# Altium PCB 20A_3V3_EVB.PcbDoc
Units mil, origin at the board's own origin, x right, y up, seen from the top; angles counter-clockwise.
Board outline 1909.45 x 1606.3 mil, 4 copper layers (Top Layer, Layer 1, Layer 2, Bottom Layer), stack 62.45 mil thick; 36 components, 20 nets, 115 pads, 836 vias.
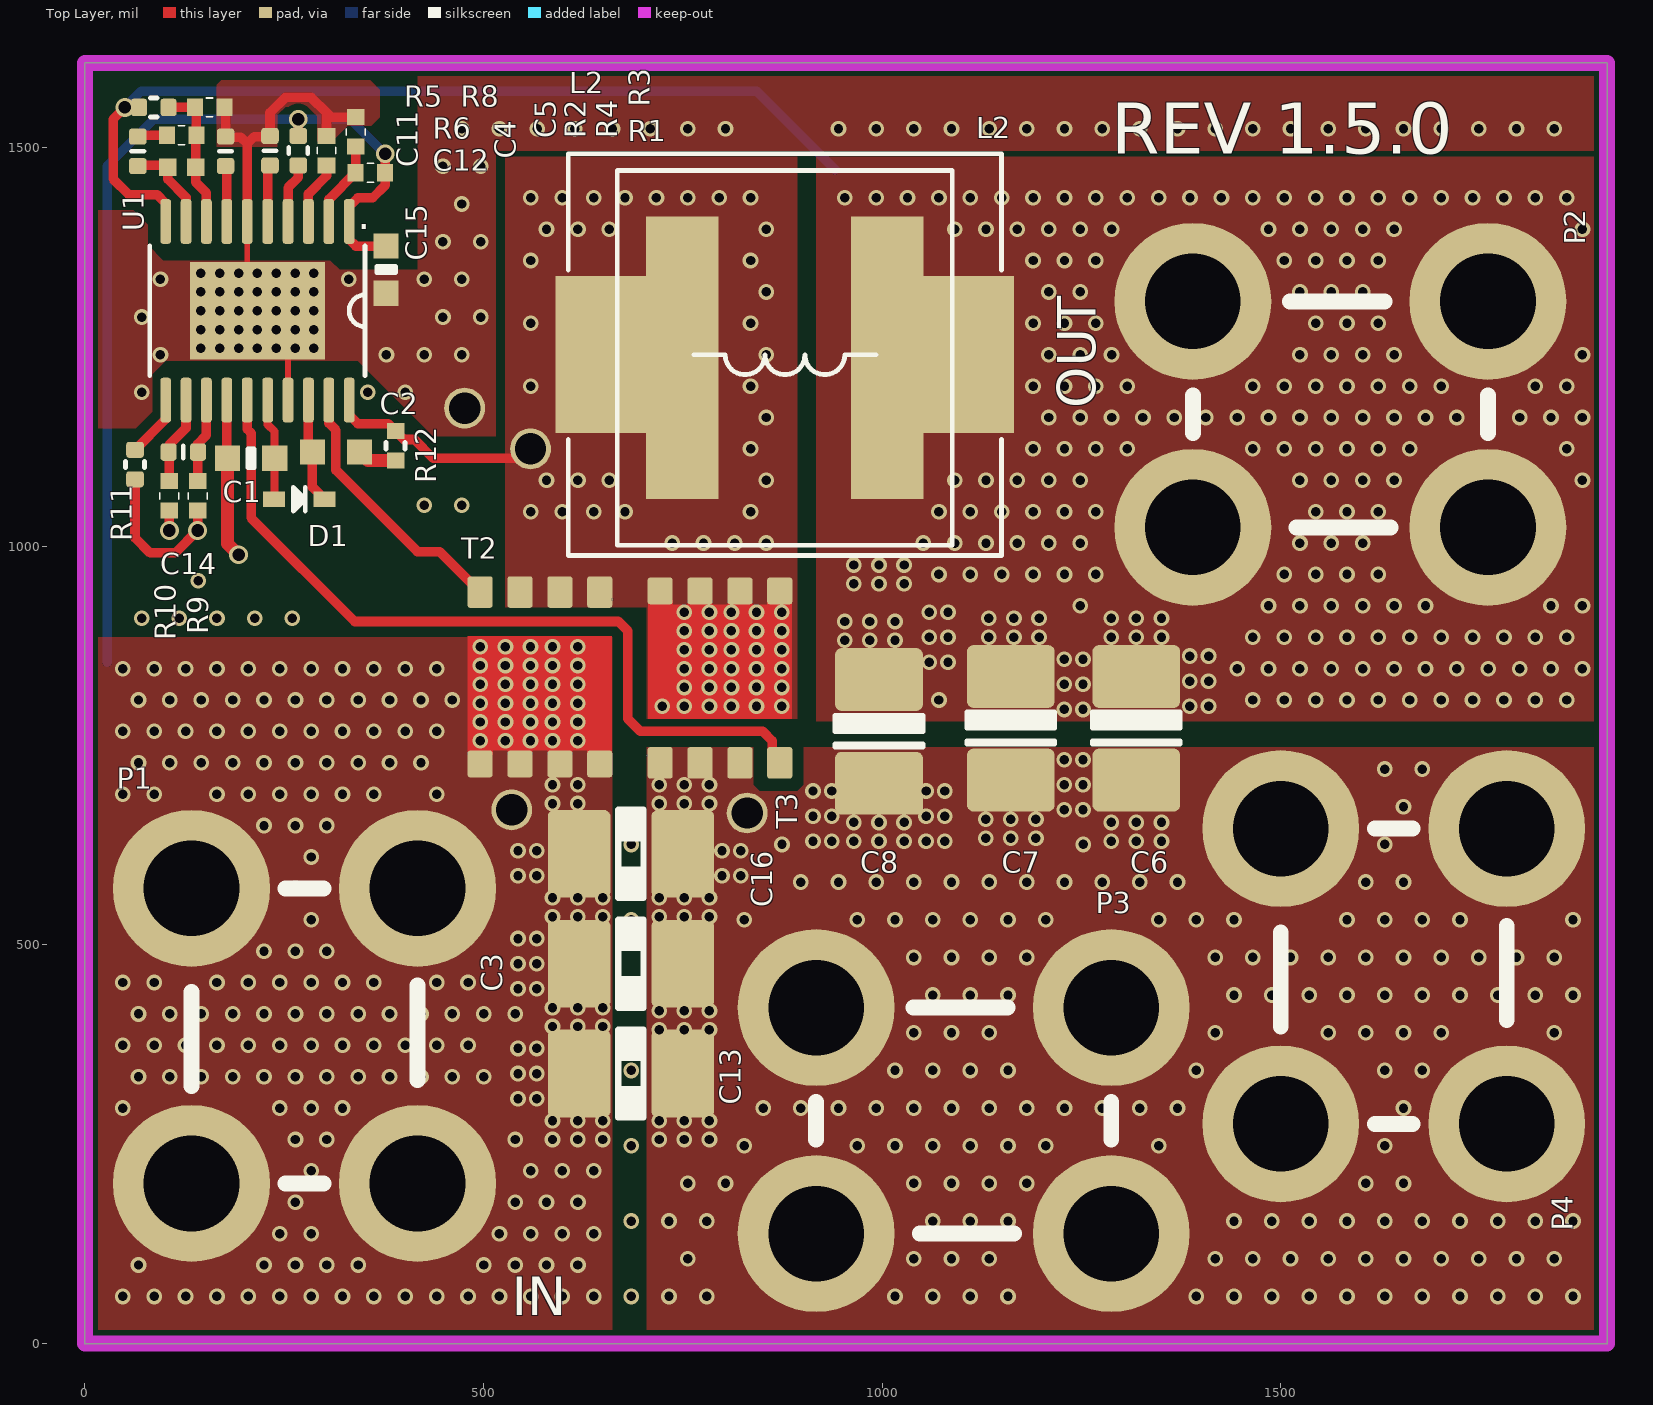
[diagram p0: Top Layer view]
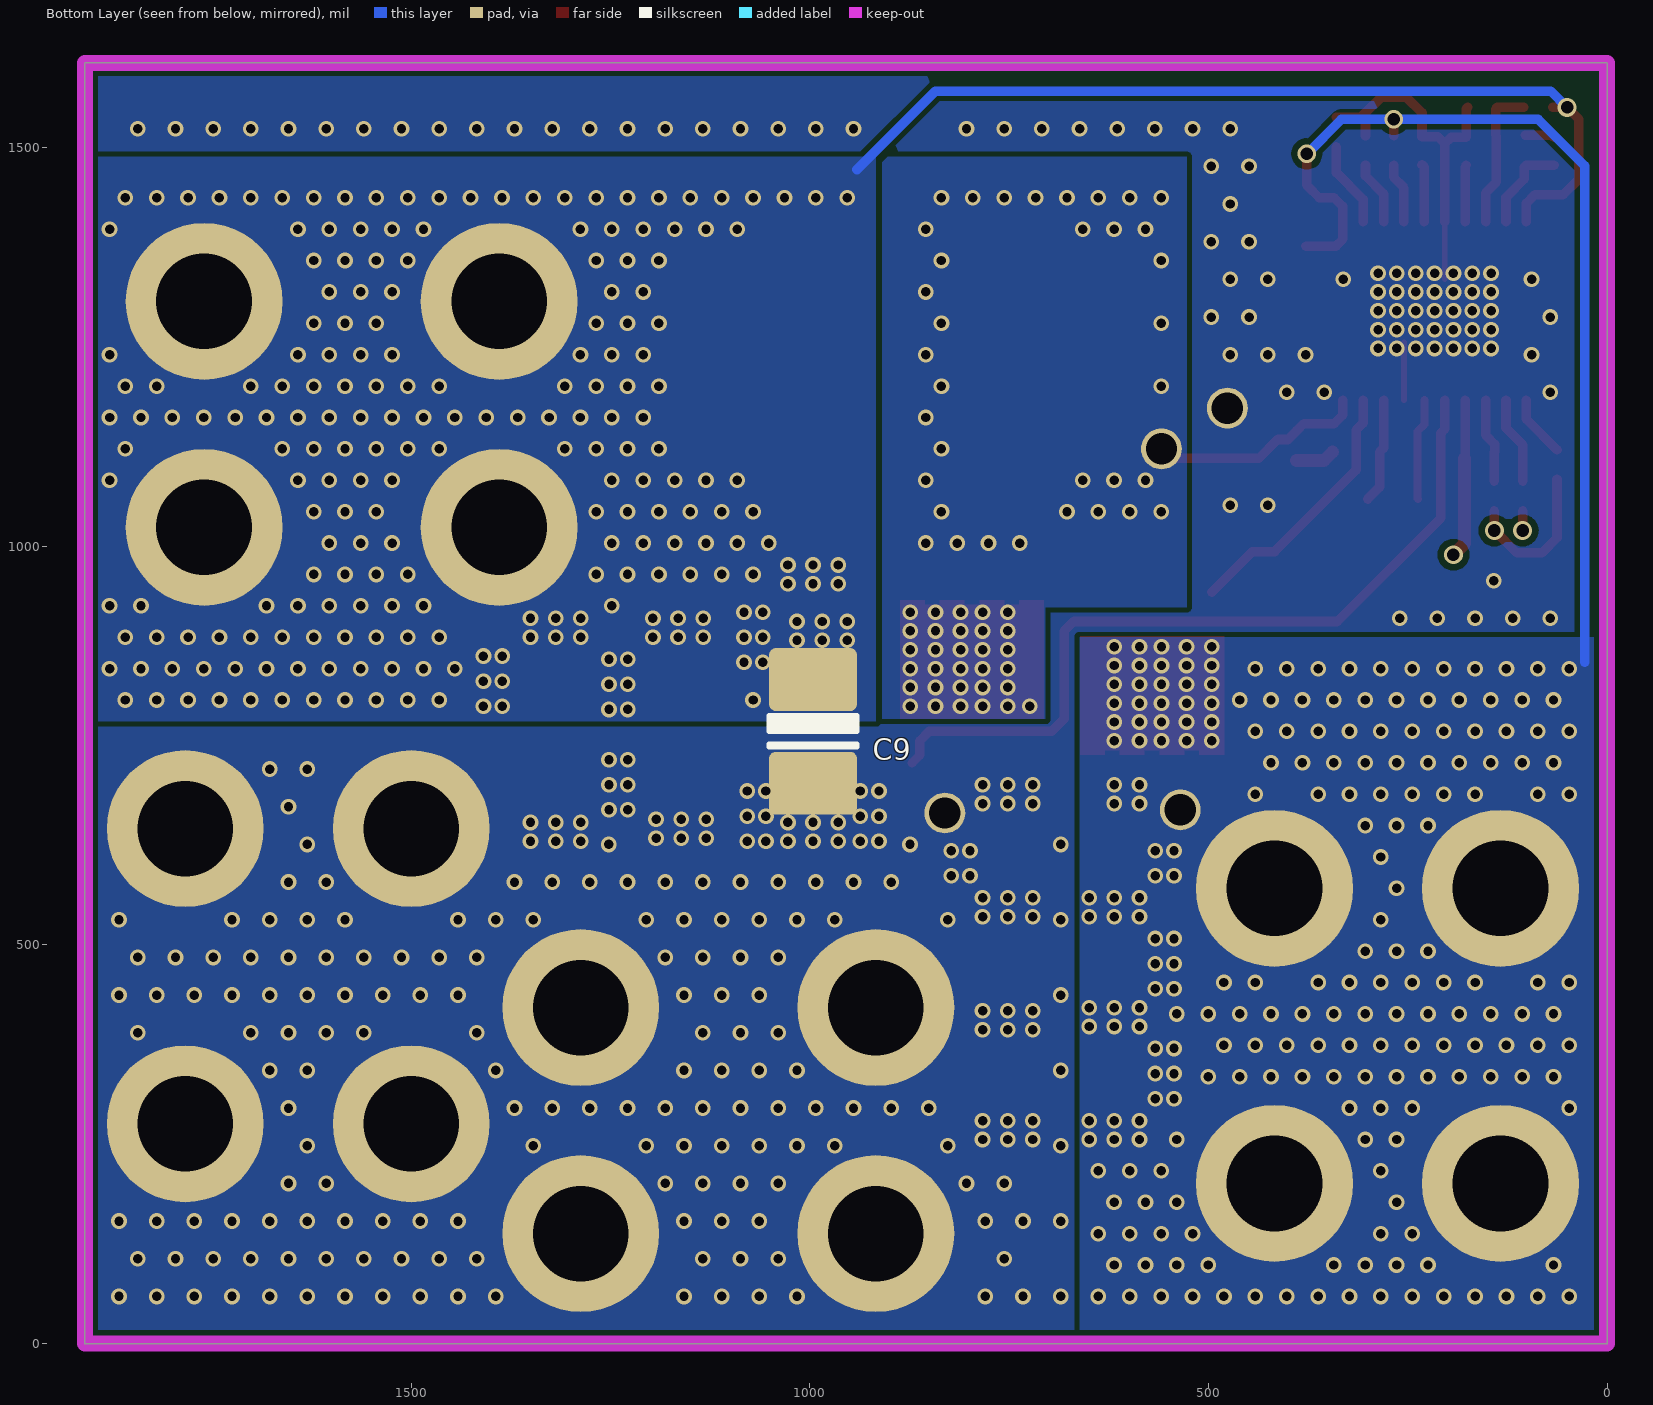
[diagram p1: Bottom Layer view, seen from below]
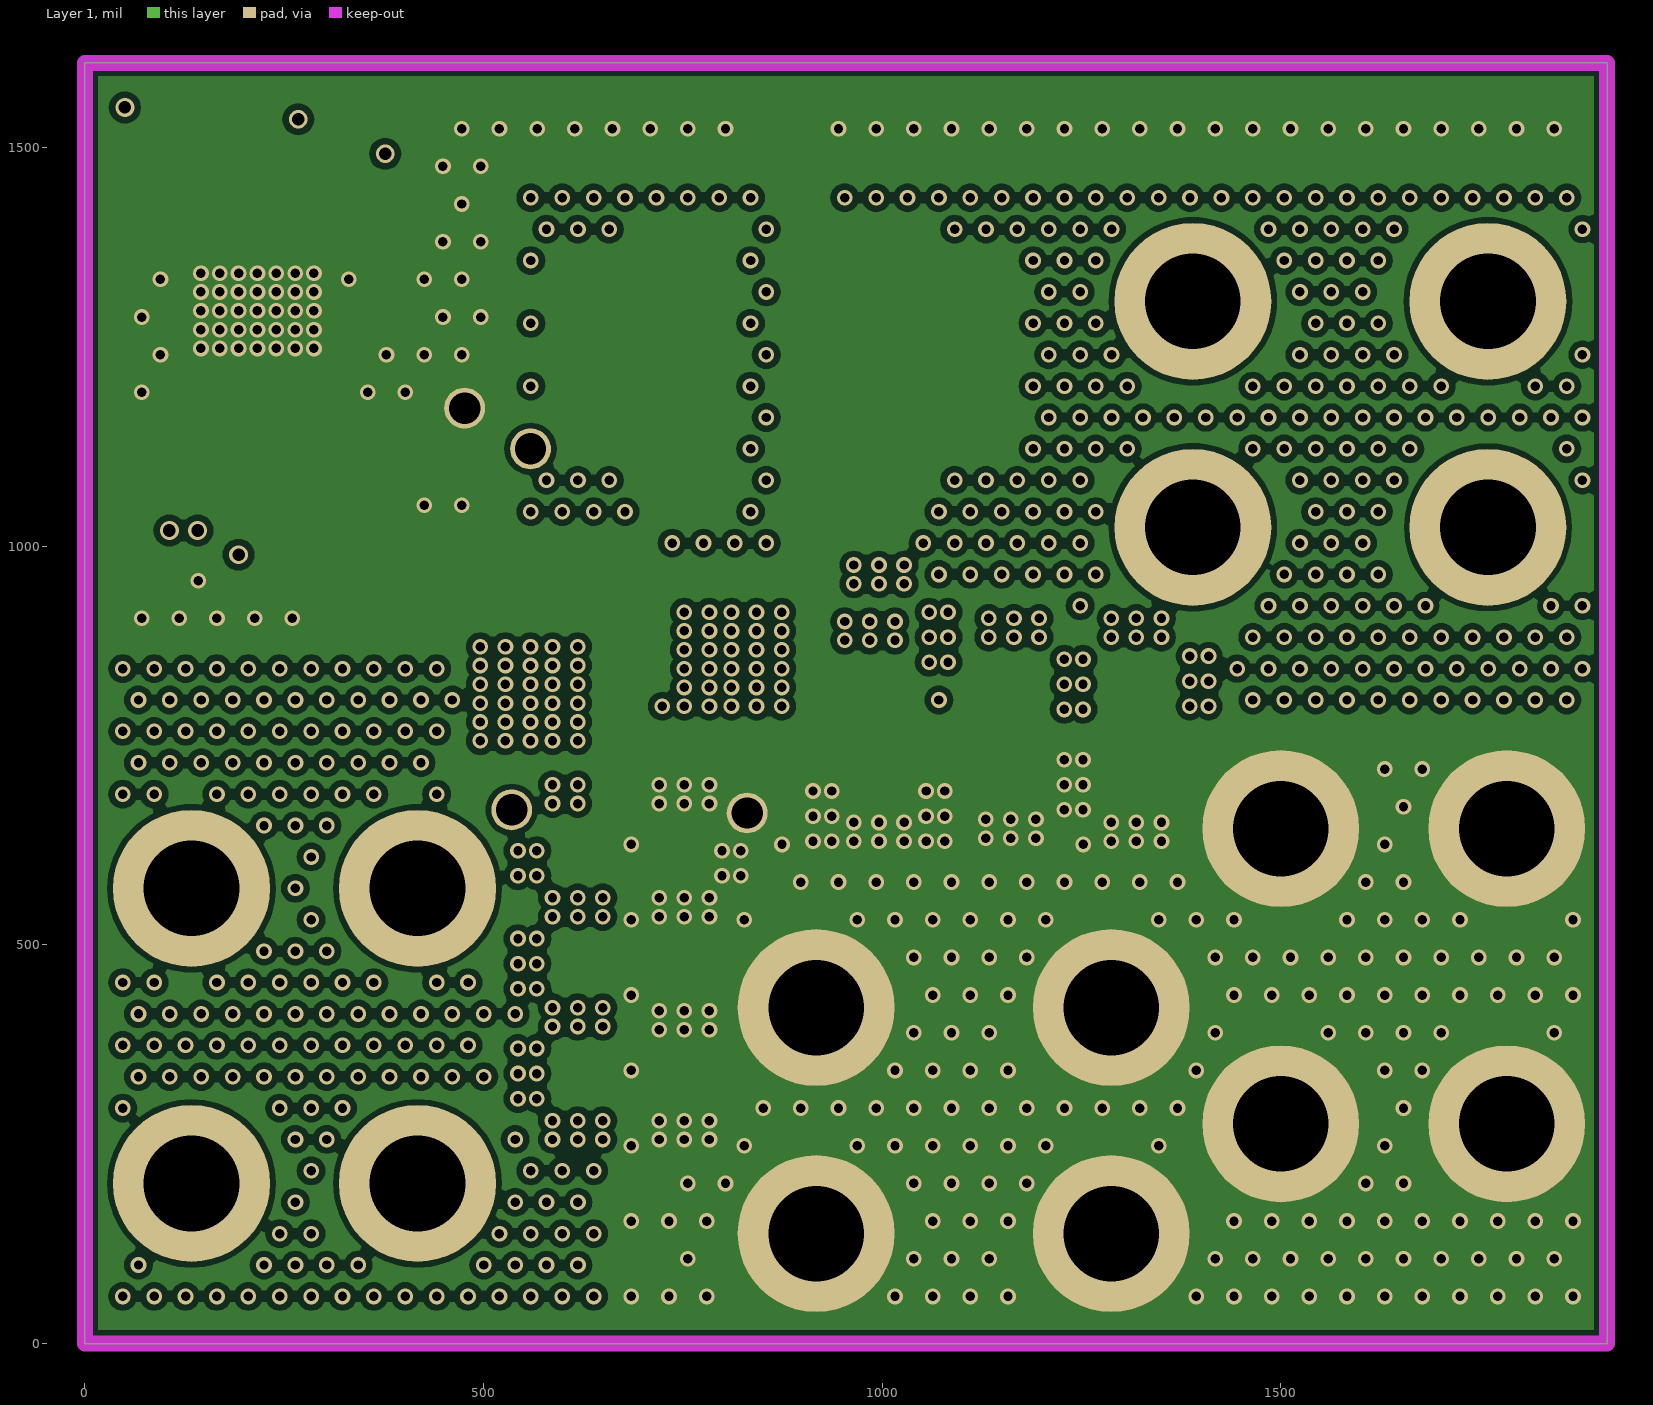
[diagram p2: Layer 1]
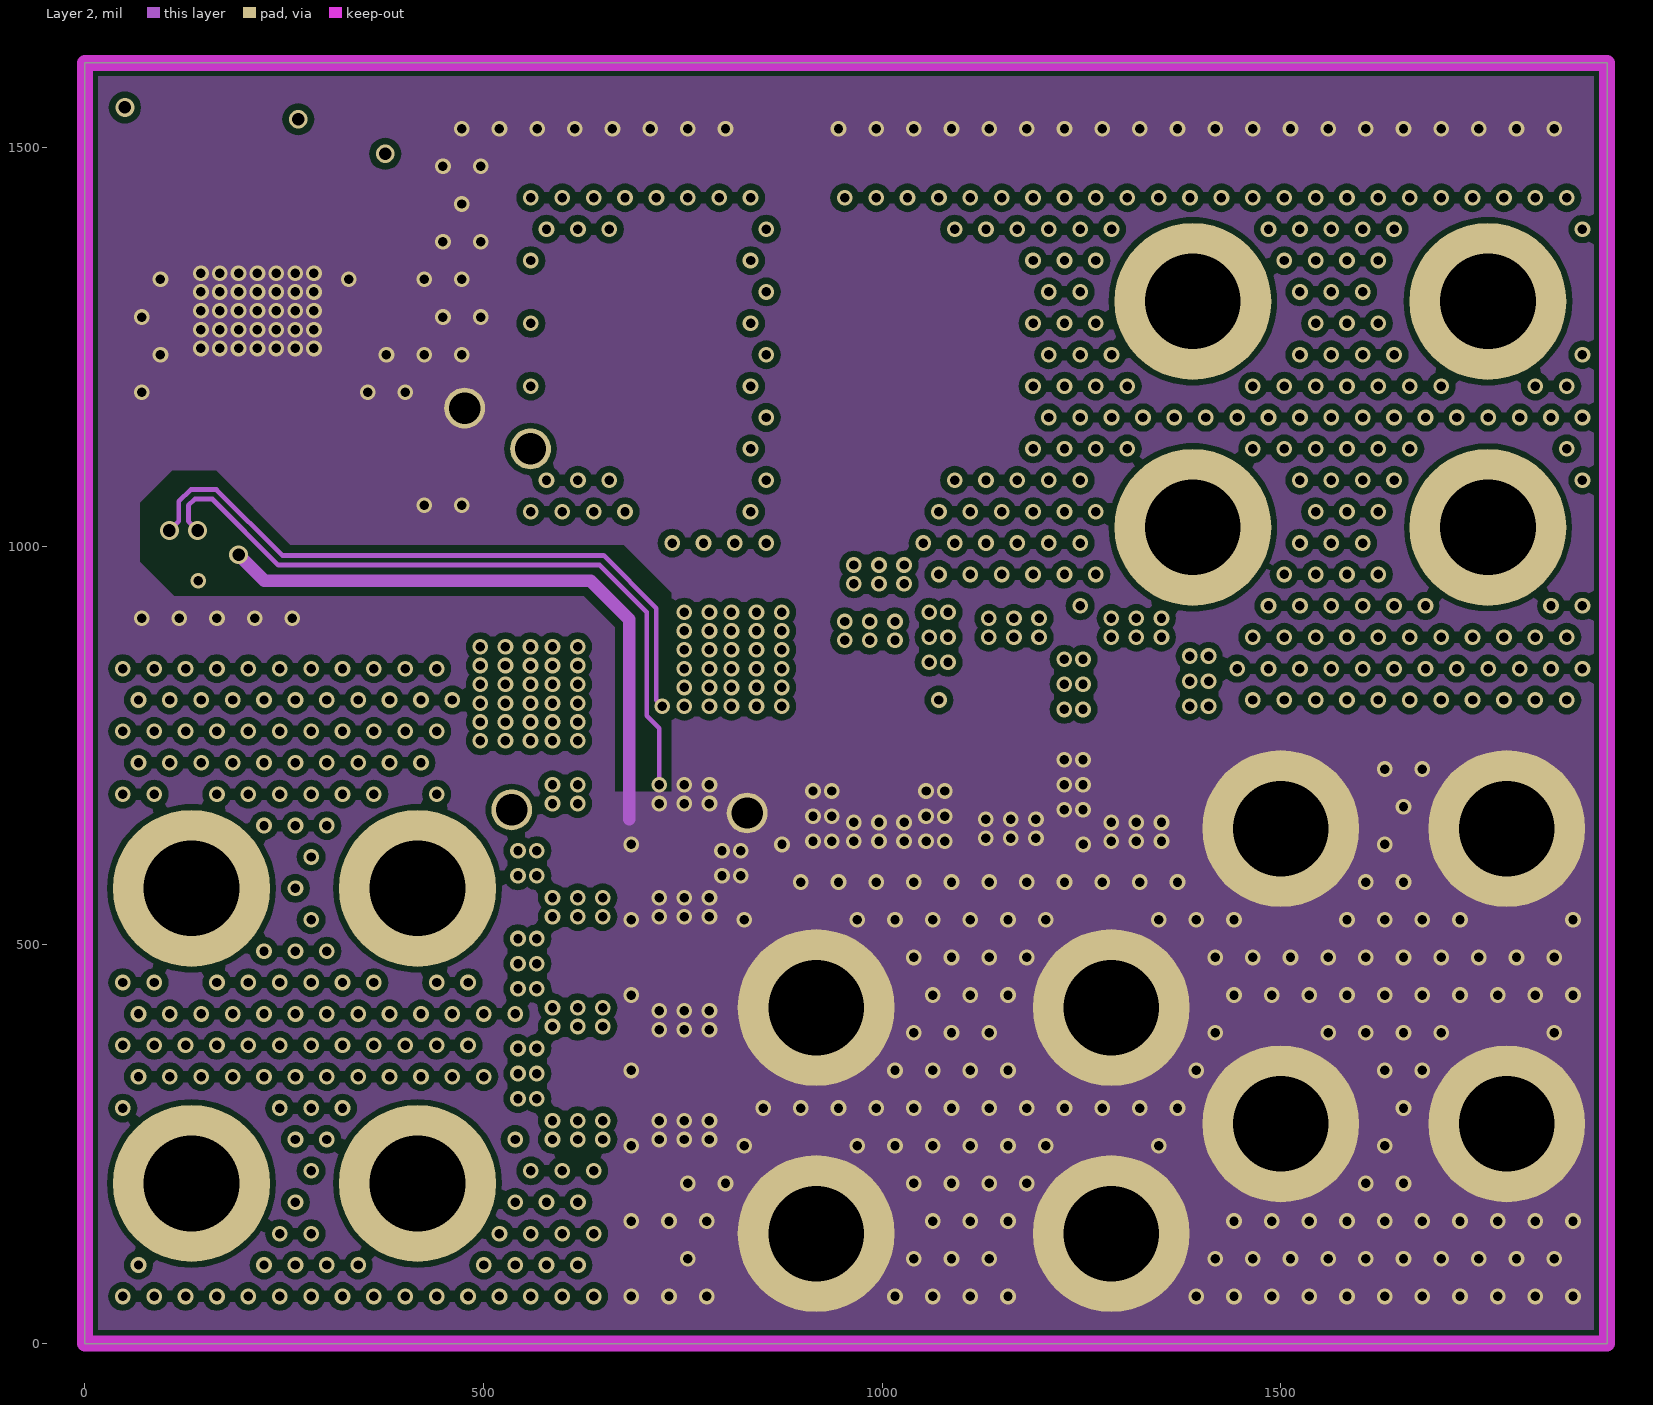
[diagram p3: Layer 2]
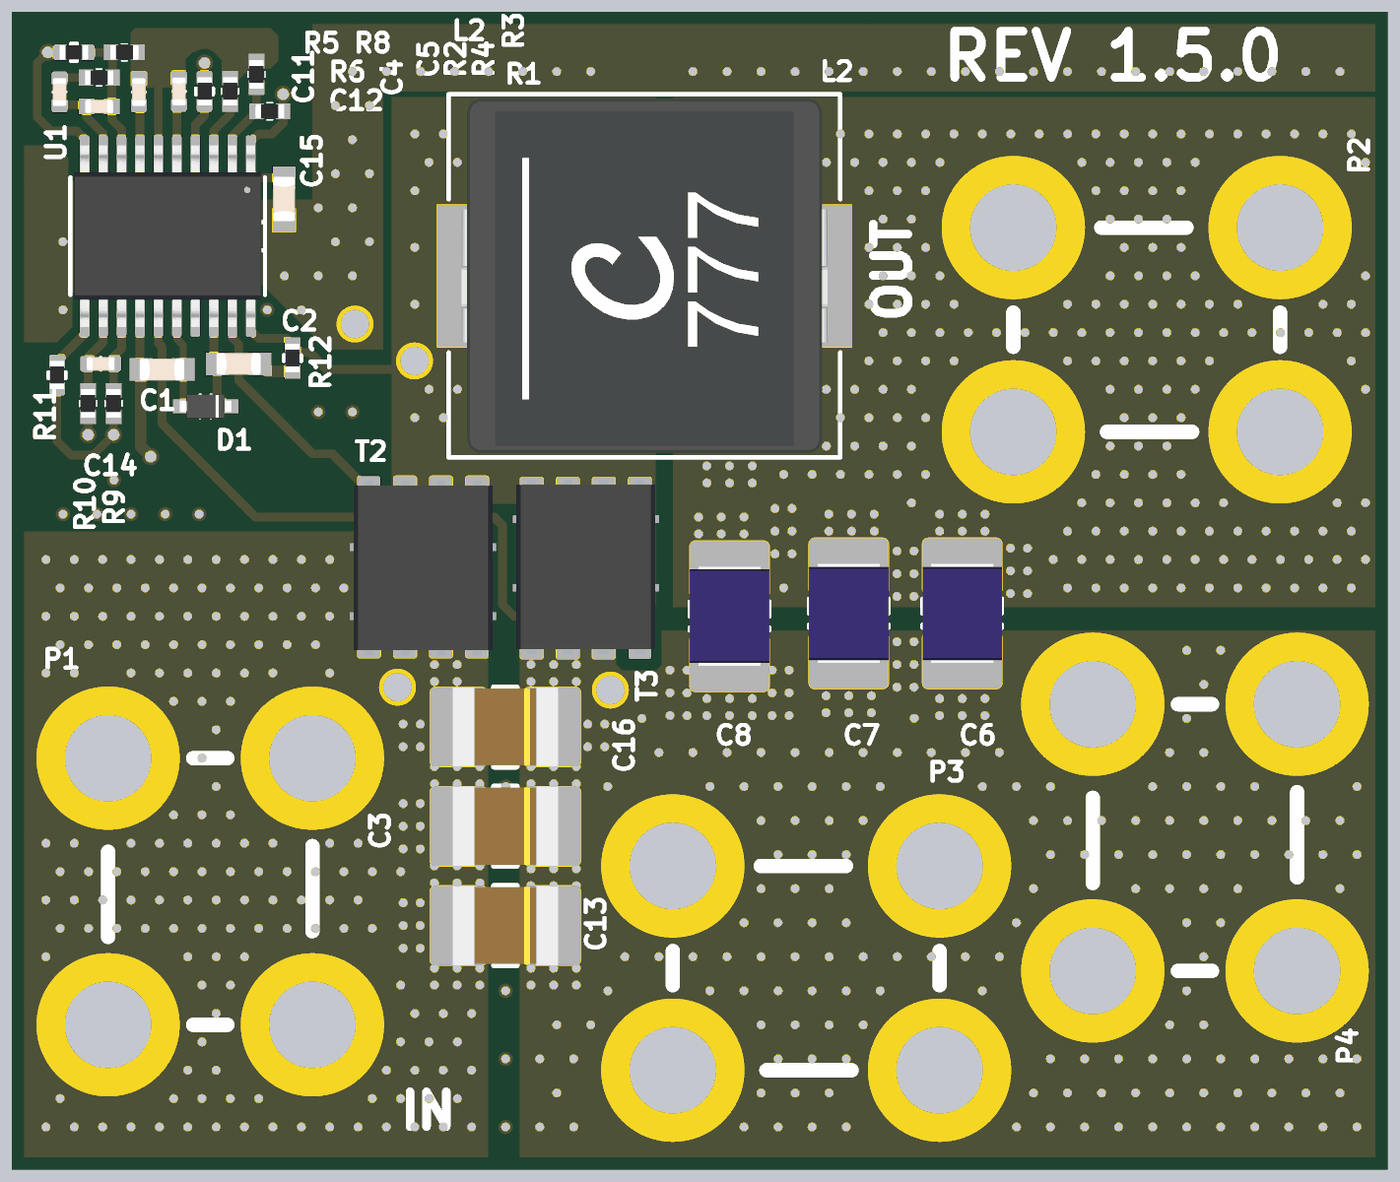
[diagram p4: 3D render of the assembled board from above, using the file's embedded part models]

## Layer stack, top to bottom
Top Solder: solder mask 0.4, Solder Resist, Dk 3.5
Top Layer: signal copper 1.3798
Dielectric 2: prepreg 8.28, PP-022, Dk 4.5
Layer 1: signal copper 0.6
Dielectric 1: dielectric 41.93, FR-4, Dk 4.8
Layer 2: signal copper 0.6
Dielectric 3: prepreg 8.28, PP-022, Dk 4.5
Bottom Layer: signal copper 1.3798
Bottom Solder: solder mask 0.4, Solder Resist, Dk 3.5

## Board outline
0,0 0,1606.3 1909.45,1606.3 1909.45,0

## Design rules (kind name [scope] priority, off if disabled: settings)
Clearance [All] p1: gap=6 ignorepadtopadclearanceinfootprint=FALSE except(0: Arc-Hole Track-Hole SMDPad-Hole THPad-Hole Via-Hole Fill-Hole Poly-Hole Region-Hole Text-Hole; 7: Arc-Poly Track-Poly THPad-Poly Fill-Poly Poly-Poly; 8: SMDPad-Region THPad-Region Via-Poly Poly-Region)
ComponentClearance ComponentClearance_1 [InComponent('*') vs InComponent('TP*')] p1: gap=10 collisioncheckmode=3 verticalgap=10 showdistances=FALSE
ComponentClearance INDUCTOR [InComponent('L1') vs InComponent('L2')] p2: gap=0 collisioncheckmode=3 verticalgap=0 showdistances=FALSE
ComponentClearance [All] p3: gap=11.81 collisioncheckmode=3 verticalgap=11.81 showdistances=FALSE
DiffPairsRouting [All] p1: maxlimit=6 minlimit=6 mostfreqgap=6 toplayer_minwidth=6 toplayer_maxwidth=12 toplayer_prefwidth=6 midlayer1_minwidth=6 midlayer1_maxwidth=12 midlayer1_prefwidth=6 midlayer2_minwidth=6 midlayer2_maxwidth=12 midlayer2_prefwidth=6 bottomlayer_minwidth=6 bottomlayer_maxwidth=12 bottomlayer_prefwidth=6 maxuncoupledlength=500
Height [All] p1: minheight=0 maxheight=1574.8 prefheight=500
HoleSize [All] p1: absolutevalues=TRUE maxlimit=236.22 minlimit=1 maxpercent=80.000 minpercent=20.000
HoleToHoleClearance [All] p1: gap=3 allowstackedmicrovias=TRUE
MinimumSolderMaskSliver [All] p1: minsoldermaskwidth=1
PlaneConnect [All] p1: planeconnectstyle=Direct reliefexpansion=20 reliefentries=4 reliefconductorwidth=10 reliefairgap=10
PolygonConnect [All] p1: connectstyle=Direct reliefconductorwidth=12 reliefentries=4 polygonreliefangle="90 Angle" airgapwidth=12
RoutingVias [All] p1: holewidth=15.75 width=23.62 viastyle="Through Hole" minholewidth=11.81 minwidth=19.68 maxholewidth=110.24 maxwidth=118.11
SilkToSilkClearance [All] p1: silktosilkclearance=3
SilkToSolderMaskClearance [IsPad] p1: minsilkscreentomaskgap=1 clearancetoexposedcopper=TRUE
SolderMaskExpansion [All] p1: expansion=1
Width [All] p1: maxlimit=40 minlimit=6 preferedwidth=10
21 further rules are at their usual default settings.

## Components (designator, comment, footprint, x,y, rotation, side; value= is the part's Value field where it differs from the comment)
C1 "1uF" C0603 208.66,1110.24 r0 top
C2 "1uF" C0603 314.96,1118.11 r180 top
C3 "22uF" 1210 685.04,476.38 r180 top
C4 "33nF" 0402#1 176.54,1495.28 r270 top
C5 "82pF" 0402#1 232.28,1496.06 r270 top
C6 "100uF" 3528 1318.9,771.65 r270 top
C7 "100uF" 3528 1161.42,771.66 r270 top
C8 "100uF" 3528 996.06,767.72 r270 top
C9 "100uF" 3528 996.06,767.72 r270 bottom
C11 "22nF" 0402#1 66.54,1495.28 r270 top
C12 "750pF" CAP_CC0402_YAG 121.54,1475.28 r180 top
C13 "22uF" 1210 685.04,338.58 r180 top
C14 "5n6F" 0402#1 123.58,1118.11 r0 top
C15 "100nF" C0603 377.95,1346.83 r270 top
C16 "22uF" 1210 685.04,614.17 r180 top
D1 "BAS516" SOD-523 269.09,1059.06 r180 top
L2 "1uH" XAL1010 877.95,1236.22 r0 top
L2 "1.0uH" L126X 877.95,1240.16 r0 top
P1 "M4_CON" PCBComponent_1 275.59,385.83 r0 top
P2 "M4_CON" PCBComponent_1 1574.8,1165.35 r90 top
P3 "M4_CON" PCBComponent_1 1102.36,279.53 r270 top
P4 "M4_CON" PCBComponent_1 1641.73,460.63 r180 top
R1 "45k3" 0402_PAN 358.27,1468.5 r0 top
R2 "1M" 0402#1 267.72,1496.06 r90 top
R3 "2k32" 0402_PAN 339.77,1519.69 r270 top
R4 "14k" 0402_PAN 303.15,1496.06 r270 top
R5 "2k4" 0402#1 86.54,1550.28 r0 top
R6 "3k3" 0402_PAN 121.54,1515.28 r180 top
R8 "1k4" 0402_PAN 156.54,1550.28 r0 top
R9 "110R" 0402_PAN 141.54,1062.99 r270 top
R10 "110R" 0402_PAN 106.08,1062.99 r270 top
R11 "0R" 0402#1 62.99,1102.36 r270 top
R12 "0R" 0402#2 389.76,1125.98 r90 top
T2 "BSC034N06NS" PQFNWB5x6 570.87,834.65 r270 top
T3 "BSC034N06NS" PQFNWB5x6 796.65,836.12 r90 top
U1 "LM25116MH" 20-HTSSOP 216.54,1295.28 r270 top

## Footprints (in the part's own frame and the unit in brackets; to place one, negate y for a bottom-side part, rotate by r counter-clockwise, add the part's x,y. Pads: shape width x height; smd on the part's side, far side on the other; paste and mask are expansions set on the pad)
20-HTSSOP [mm]
  rrect50% 1.422x0.34 smd: 1(-2.845,2.925) 2(-2.845,2.275) 3(-2.845,1.625) 4(-2.845,0.975) 5(-2.845,0.325) 6(-2.845,-0.325) 7(-2.845,-0.975) 8(-2.845,-1.625) 9(-2.845,-2.275) 10(-2.845,-2.925) 11(2.845,-2.925) 12(2.845,-2.275) 13(2.845,-1.625) 14(2.845,-0.975) 15(2.845,-0.325) 16(2.845,0.325) 17(2.845,0.975) 18(2.845,1.625) 19(2.845,2.275) 20(2.845,2.925)
  rect 3.1x4.3 smd: 21(0,0)
  silkscreen extent -2.07,-3.43 2.07,3.43, body extent -3.2,-3.3 3.2,3.3, height 1.09
0402#1 [mil]
  rrect35% 20x22 smd: 1(-18.5,0) 2(18.5,0)
  silkscreen extent 0,-8 0,8, body extent -20,-10 20,10, height 20
0402#2 [mil]
  rect 20x22 smd: 1(-18.5,0) 2(18.5,0)
  silkscreen extent -4,-12 4,12, body extent -20,-10 20,10, height 14
0402_PAN [mil]
  rect 20x22 smd paste+0 mask+0: 1(-18.5,0) 2(18.5,0)
  silkscreen extent -4,-12 4,12, body extent -20,-10 20,10, height 14
1210 [mil]
  rrect20% 78.74x110 smd: 1(-65,0) 2(65,0)
  silkscreen extent -16,-55 16,55, body extent -73,-55 73,55, height 110
3528 [mil]
  rrect20% 78.74x110 smd: 1(-65,0) 2(65,0)
  silkscreen extent -20,-55 20,55, body extent -69,-55 69,55, height 75
C0603 [mm]
  rect 0.8x0.8 smd: 1(-0.75,0) 2(0.75,0)
  silkscreen extent -0.1,-0.3 0.1,0.3, body extent -0.8,-0.4 0.8,0.4, height 0.81
CAP_CC0402_YAG [mil]
  rect 22x22 smd: 1(-17.5,0) 2(17.5,0)
  body extent -20,-10 20,10, height 20
L126X [mm]
  rect 3x5 smd: 1(-5.8,0) 2(5.8,0)
  silkscreen extent -6.9,-6.4 6.9,6.4, body extent -6.44,-6.25 6.46,6.25, height 6.4
PCBComponent_1 [mm]
  round 5 hole 3.05: 1(-3.6,-4.7) 1(-3.6,4.7) 1(3.6,-4.7) 1(3.6,4.7)
  silkscreen extent -3.6,-4.7 3.6,4.7
PQFNWB5x6 [mm]
  rrect20% 1x0.8 smd: 1(-2.738,1.905) 2(-2.738,0.635) 3(-2.738,-0.635) 4(-2.738,-1.905)
  rrect20% 0.85x0.8 smd: 5(2.738,-1.905) 6(2.738,-0.635) 7(2.738,0.635) 8(2.738,1.905)
  Top Layer region: 2.2,-2.3 2.454,-2.3 2.454,-1.5 2.2,-1.5
  Top Layer region: 2.2,-1.035 2.454,-1.035 2.454,-0.235 2.2,-0.235
  Top Layer region: 2.2,0.235 2.454,0.235 2.454,1.035 2.2,1.035
  Top Layer region: -1.337,-2.3 2.313,-2.3 2.313,2.3 -1.337,2.3
  Top Layer region: 2.454,2.3 2.2,2.3 2.2,1.5 2.454,1.5
  Top Layer region: -0.564,1.166 -0.564,1.166 -0.564,1.166 -0.564,1.166 -0.564,1.166 -0.564,1.166 -0.564,1.166 -0.564,1.166
  Top Layer region: -0.564,-1.166 -0.564,-1.166 -0.564,-1.166 -0.564,-1.166 -0.564,-1.166 -0.564,-1.166 -0.564,-1.166 -0.564,-1.166
  body extent -3.07,-2.57 3.08,2.58, height 1
SOD-523 [mm]
  rect 0.7x0.5 smd: 1(-0.8,0) 2(0.8,0)
  silkscreen extent -0.19,-0.38 0.19,0.38, body extent -0.91,-0.42 0.92,0.42, height 0.71
XAL1010 [mil]
  rect 91x354 smd paste+0 mask+0: 1(-128.5,0) 2(128.5,0)
  silkscreen extent -210,-235 210,235, body extent -207,-232 207,232, height 393

## Part data
C1 C2: library part OUDEIBUN_1uF, "0603 1UF 16V 10% 105K X5R", Mfr.=OUDEIBUN, Mfr. No=105K, ComponentLink1Description=taobao, ComponentLink1URL=https://detail.tmall.com/item.htm?abbucket=11&id=610883455002&rn=96f7b0dde361d4c3b62eb7ab1af2da05&skuId=4292434832790&spm=a1z10.3-b.w4011-22147617817.48.46817d1eD6aiZS, Price=0.03
C3 C13 C16: library part OUBEIDUN_226K_X7R_100V, "1210 22UF 226K 100V X7R", Mfr.=OUBEIDUN, Mfr. No=22uF/100V, ComponentLink1Description=taobao, ComponentLink1URL=https://detail.tmall.com/item.htm?abbucket=11&id=611466299848&rn=0b473a83d8464c2abde96b12f8b0e71f&skuId=4303396365636&spm=a1z10.3-b.w4011-22147617817.151.31717d1ewwcxVn, Price=1.2
C4 C11: library part OBEIDUN_33nF, "0402 33nF 333K 16V X7R", Mfr.=OBEIDUN, Mfr. No=333K, ComponentLink1Description=taobao, ComponentLink1URL=https://detail.tmall.com/item.htm?abbucket=11&id=610643367827&rn=485ffb871bba3336ec56bdf6e40ebf1b&skuId=4293224337085&spm=a1z10.3-b.w4011-22147617817.69.91e77d1e9KkI7E, Price=0.03
C5: library part taobao_82pF, "82pF 50V C0G CL05C820JB5NNNC", Mfr.=Samsung, Mfr. No=CL05C820JB5NNNC, ComponentLink1Description=taobao, ComponentLink1URL=https://item.taobao.com/item.htm?spm=a1z09.2.0.0.10c82e8dL5BzWq&id=619526874964&_u=l10quk0ka3f0, Price=0.03
C6 C7 C8 C9: library part 6TPE100MPB, "6TPE100MAZB 6.3V 100uF ESR 25mR", Mfr.=Auwah, Mfr. No=6TPE100MAZB, ComponentLink1Description=taobao, ComponentLink1URL=https://detail.tmall.com/item.htm?id=608667689658&spm=a1z0d.6639537/tb2.1997196601.4.461a748465LZBL&skuId=4600334325022, Price=1.0
C12: library part GCM1555C1H330JA16J, "GCM1555C1H330JA16J", Mfr.="Murata Electronics", ComponentLink1Description=mouser, ComponentLink1URL=https://www.mouser.hk/ProductDetail/Murata-Electronics/GCM1555C1H330JA16J?qs=hNud%2FORuBR35r9xfgxU5AA%3D%3D, Mfr. No=GCM1555C1H330JA16J
C14: library part OBEIDUN_5n6F, "0402 562K 5.6NF 50V X7R", Mfr.=OBEIDUN, Mfr. No=562K, ComponentLink1Description=taobao, ComponentLink1URL=https://detail.tmall.com/item.htm?_u=i10quk0kb5ea&id=609907244741&spm=a1z09.2.0.0.485e2e8ddN1cee, Price=0.015
C15: library part OUDEIBUN_100nF, "0603 100NF 50V 10% 104K X7R", Mfr.=OUDEIBUN, Mfr. No=104K, ComponentLink1Description=taobao, ComponentLink1URL=https://detail.tmall.com/item.htm?_u=p10quk0k2f35&id=610651934672&spm=a1z09.2.0.0.77b12e8d9iVia0&skuId=4463522550238, Price=0.025
D1: library part OBEIDUN_BAS516, "SOD-523 100V/250mA", Mfr.=OBEIDUN, Mfr. No=BAS516,61, ComponentLink1Description=taobao, ComponentLink1URL=https://detail.tmall.com/item.htm?abbucket=11&id=627344864030&rn=9e03fb0dc0c82be40d648479edaa9265&skuId=4457291933929&spm=a1z10.3-b.w4011-22147617817.46.572e7d1eRfO8kn, Price=0.14
L2: library part XAL1010-102MEB, "1uH Shld 20% 43.5A 1.1mOhms", Mfr.=Coilcraft, Mfr. No=XAL1010-102, ComponentLink1Description=taobao, ComponentLink1URL=https://item.taobao.com/item.htm?spm=a1z09.2.0.0.2f012e8dsWfgWQ&id=647080730279&_u=o10quk0k0a39, Price=15.0
L2: library part L1260_102, "HC1260 1R0M", Mfr.=HuiCi, Mfr. No=EPC1265_1R0, ComponentLink1Description=taobao, ComponentLink1URL=https://item.taobao.com/item.htm?id=727903070323&spm=a1z0d.6639537/tb.1997196601.22.15e27484tAONUM&skuId=5218005750787, Price=1.4
P1 P2 P3 P4: Mfr.=LFX, Mfr. No=PCB-10-4, ComponentLink1Description=taobao, ComponentLink1URL=https://item.taobao.com/item.htm?spm=a1z09.2.0.0.45712e8dxvwLo5&id=531030902005&_u=s10quk0k994a, Price=0.41
R1 R3 R8: library part RC0402FR-070RL, "RC0402FR-070RL / Thick Film Resistors - SMD 0 Ohms 62.5mW 0402 1%", Mfr.=YAGEO, ComponentLink1Description=mouser, ComponentLink1URL=https://www.mouser.hk/ProductDetail/YAGEO/RC0402FR-070RL?qs=sxZXDnvRBEhfSy4CZGX2ww%3D%3D, Mfr. No=RC0402FR-070RL
R2: library part OUDEIBUN_1M, "OUDEIBUN / 1% 1M", Mfr.=OUDEIBUN, ComponentLink1Description=taobao, ComponentLink1URL=https://detail.tmall.com/item.htm?abbucket=11&id=608939673744&rn=c46e4f8982e6d7862a81dc35563fabd4&spm=a1z10.3-b.w4011-22147617817.102.75587d1etnNQON&skuId=4277313148184, Mfr. No=1M, Price=0.02
R4: library part RT0402FRE0715KL, "RT0402FRE0715KL / SMD 1/16W 15K ohm 1% 50ppm", Mfr.=YAGEO, ComponentLink1Description=mouser, ComponentLink1URL=https://www.mouser.hk/ProductDetail/YAGEO/RT0402FRE0715KL?qs=BXCcY9r%252B08DJ61RmusQ2ew%3D%3D, Mfr. No=RT0402FRE0715KL
R5: library part OUDEIBUN_2k4, "OUDEIBUN / 1% 2k4", Mfr.=OUDEIBUN, ComponentLink1Description=taobao, ComponentLink1URL=https://detail.tmall.com/item.htm?abbucket=13&id=608847085071&rn=5bc64e1df7efd0e1787ebbcda2a02caa&spm=a1z10.3-b.w4011-22147617817.41.43317d1e4BZXd6&skuId=4279724601891, Mfr. No=2k4, Price=0.02
R6: library part RC0402FR-0757K6L, "Thick Film Resistors - SMD 57.6 kOhms 62.5mW 0402 1%", ComponentLink1Description=mouser, ComponentLink1URL=https://www.mouser.hk/ProductDetail/YAGEO/RC0402FR-0757K6L?qs=Is6ZsIPfHkYex3cihc3pCQ%3D%3D
R9 R10: library part 0402WGF0000TCE, "0R ±1% 1/16W", Mfr.=UNIOHM, Mfr. No=0R, ComponentLink1Description=taobao, ComponentLink1URL=https://item.taobao.com/item.htm?spm=a1z10.3-c-s.w4002-24706531953.10.75da6a4bMSLHjB&id=605411575000, Price=0.012
R11 R12: library part OUDEIBUN_0R, "OUDEIBUN / 0R 1% 1/16W", Mfr.=OUDEIBUN, ComponentLink1Description=taobao, ComponentLink1URL=https://detail.tmall.com/item.htm?abbucket=11&id=609078082053&rn=dd22835191e181ef543cf6f0827e8de3&spm=a1z10.3-b.w4011-22147617817.40.1e787d1eBkSpf5&skuId=4447040574382, Mfr. No=0R, Price=0.02
T2 T3: "MPower Transistor, 60V", Mfr.="Infineon Technologies", ComponentLink1Description=taobao, ComponentLink1URL=https://detail.tmall.com/item.htm?abbucket=12&id=712516353118&ns=1&spm=a21n57.1.0.0.5a70523ceCAuo0&skuId=4992670365636, Mfr. No=BSC034N06NS, Price=4.5
U1: "Switching Controllers WIDE RANGE SYNC BUCK CONTROLLER", Mfr.="Texas Instruments", ComponentLink1Description=mouser, ComponentLink1URL=https://www.mouser.hk/ProductDetail/Texas-Instruments/LM25116MH-NOPB?qs=X1J7HmVL2ZFRPxaLhhIUKg%3D%3D, Mfr. No=LM25116MH

## Free pads (board coordinates)
  round 51.18 hole 39.37 paste+0 mask+0.04: 3(476.38,1173.23) 3(535.43,669.29) 3(559.06,1122.05) 4(830.71,665.35)

## Via types
v1: diameter 19.68, hole 11.81, Top Layer to Bottom Layer, tented both sides, 830 vias
v2: diameter 23.62, hole 15.75, Top Layer to Bottom Layer, tented both sides, 6 vias

## Nets (pads, with @x,y where several pads share a name; then routed paths per layer and width w, separated by ;. In a path a pad name is that pad's centre, name@x,y a point inside that pad or via, vN(x,y) a via of type N, cw(c..) or ccw(c..) an arc to the next point about the centre after c; other vN are vias at no path point)
+3V3: C6.1 C7.1 C8.1 C9.1 L2.2 P2.1 R5.1 U1.10 | length 1154.9
  Top Layer w12: R5.1 v2(50.28,1550.28) 35.43,1535.43 35.43,1460.63 55.12,1440.94 90.55,1440.94 101.38,1430.12 U1.10
  Bottom Layer w12: v2(50.28,1550.28) 70.87,1570.87 842.52,1570.87 940.94,1472.44
  other v1: 1228.35,795.28 1251.97,795.28 1385.83,799.21 1409.45,799.21 1071.26,807.09 1464.96,807.09 1504.33,807.09 1543.7,807.09 1583.07,807.09 1622.44,807.09 1661.81,807.09 1701.18,807.09 1740.55,807.09 1779.92,807.09 1819.29,807.09 1858.66,807.09 1228.35,826.77 1251.97,826.77 1385.83,830.71 1409.45,830.71 1445.28,846.46 1484.65,846.46 1524.02,846.46 1563.39,846.46 1602.76,846.46 1642.13,846.46 1681.5,846.46 1720.87,846.46 1760.24,846.46 1799.61,846.46 1838.98,846.46 1878.35,846.46 1059.06,854.33 1082.68,854.33 1228.35,858.27 1251.97,858.27 1385.83,862.2 1409.45,862.2 953.15,881.89 984.65,881.89 1016.14,881.89 1059.06,885.83 1082.68,885.83 1133.86,885.83 1165.35,885.83 1196.85,885.83 1287.4,885.83 1318.9,885.83 1350.39,885.83 1464.96,885.83 1504.33,885.83 1543.7,885.83 1583.07,885.83 1622.44,885.83 1661.81,885.83 1701.18,885.83 1740.55,885.83 1779.92,885.83 1819.29,885.83 1858.66,885.83 953.15,905.51 984.65,905.51 1016.14,905.51 1133.86,909.45 1165.35,909.45 1196.85,909.45 1287.4,909.45 1318.9,909.45 1350.39,909.45 1059.06,917.32 1082.68,917.32 1248.43,925.2 1484.65,925.2 1524.02,925.2 1563.39,925.2 1602.76,925.2 1642.13,925.2 1681.5,925.2 1838.98,925.2 1878.35,925.2 964.57,952.76 996.06,952.76 1027.56,952.76 1071.26,964.57 1110.63,964.57 1150,964.57 1189.37,964.57 1228.74,964.57 1268.11,964.57 1504.33,964.57 1543.7,964.57 1583.07,964.57 1622.44,964.57 964.57,976.38 996.06,976.38 1027.56,976.38 1051.58,1003.94 1090.95,1003.94 1130.32,1003.94 1169.69,1003.94 1209.06,1003.94 1248.43,1003.94 1524.02,1003.94 1563.39,1003.94 1602.76,1003.94 1071.26,1043.31 1110.63,1043.31 1150,1043.31 1189.37,1043.31 1228.74,1043.31 1268.11,1043.31 1543.7,1043.31 1583.07,1043.31 1622.44,1043.31 1090.95,1082.68 1130.32,1082.68 1169.69,1082.68 1209.06,1082.68 1248.43,1082.68 1524.02,1082.68 1563.39,1082.68 1602.76,1082.68 1642.13,1082.68 1878.35,1082.68 1189.37,1122.05 1228.74,1122.05 1268.11,1122.05 1307.48,1122.05 1464.96,1122.05 1504.33,1122.05 1543.7,1122.05 1583.07,1122.05 1622.44,1122.05 1661.81,1122.05 1858.66,1122.05 1209.06,1161.42 1248.43,1161.42 1287.8,1161.42 1327.17,1161.42 1366.54,1161.42 1405.91,1161.42 1445.28,1161.42 1484.65,1161.42 1524.02,1161.42 1563.39,1161.42 1602.76,1161.42 1642.13,1161.42 1681.5,1161.42 1720.87,1161.42 1760.24,1161.42 1799.61,1161.42 1838.98,1161.42 1878.35,1161.42 1189.37,1200.79 1228.74,1200.79 1268.11,1200.79 1307.48,1200.79 1464.96,1200.79 1504.33,1200.79 1543.7,1200.79 1583.07,1200.79 1622.44,1200.79 1661.81,1200.79 1701.18,1200.79 1819.29,1200.79 1858.66,1200.79 1209.06,1240.16 1248.43,1240.16 1287.8,1240.16 1524.02,1240.16 1563.39,1240.16 1602.76,1240.16 1642.13,1240.16 1878.35,1240.16 1189.37,1279.53 1228.74,1279.53 1268.11,1279.53 1543.7,1279.53 1583.07,1279.53 1622.44,1279.53 1209.06,1318.9 1248.43,1318.9 1524.02,1318.9 1563.39,1318.9 1602.76,1318.9 1189.37,1358.27 1228.74,1358.27 1268.11,1358.27 1504.33,1358.27 1543.7,1358.27 1583.07,1358.27 1622.44,1358.27 1090.95,1397.64 1130.32,1397.64 1169.69,1397.64 1209.06,1397.64 1248.43,1397.64 1287.8,1397.64 1484.65,1397.64 1524.02,1397.64 1563.39,1397.64 1602.76,1397.64 1642.13,1397.64 1878.35,1397.64 953.15,1437.01 992.52,1437.01 1031.89,1437.01 1071.26,1437.01 1110.63,1437.01 1150,1437.01 1189.37,1437.01 1228.74,1437.01 1268.11,1437.01 1307.48,1437.01 1346.85,1437.01 1386.22,1437.01 1425.59,1437.01 1464.96,1437.01 1504.33,1437.01 1543.7,1437.01 1583.07,1437.01 1622.44,1437.01 1661.81,1437.01 1701.18,1437.01 1740.55,1437.01 1779.92,1437.01 1819.29,1437.01 1858.66,1437.01
NetC1_2: C1.2 D1.2 U1.16 | length 128.1
  Top Layer w10: U1.16 229.33,1152.56 238.19,1143.7 238.19,1059.65 D1.2
NetC2_1: C2.1 R12.1 | length 49.7
  Top Layer w16: C2.1 355.11,1107.48 R12.1
NetC2_2: C2.2 D1.1 U1.18 | length 132.5
  Top Layer w12: U1.18 280.51,1123.03 C2.2 285.43,1074.21 D1.1
NetC4_2: C4.2 U1.7 | length 71.2
  Top Layer w12: C4.2@176.54,1477.78 178.15,1476.16 U1.7
NetC5_2: C5.2 U1.5 | length 72.5
  Top Layer w12: U1.5 229.33,1475.61 C5.2@232.28,1478.56
NetC11_1: C11.1 R6.2 | length 37.5
  Top Layer w12: C11.1@66.54,1512.78 69.04,1515.28 R6.2
NetC11_2: C11.2 C12.2 U1.9 | length 116
  Top Layer w12: C11.2@66.54,1477.78 101.54,1477.78 C12.2 104.04,1460.31 126.97,1437.37 U1.9
NetC12_1: C12.1 R5.2 R6.1 R8.1 U1.8 | length 182.8
  Top Layer w12: R5.2 R8.1 140.04,1548.28 R6.1 139.04,1514.28 C12.1 139.04,1456.69 152.56,1443.17 U1.8
NetC14_1: C14.1 R10.1 U1.12 | length 110.4
  Top Layer w12: R10.1 106.08,1118.11 106.08,1127.34 126.97,1148.23 U1.12
NetC14_2: C14.2 R9.1 U1.13 | length 106.7
  Top Layer w12: R9.1 141.54,1117.66 141.08,1118.11 141.08,1127.78 152.56,1139.26 U1.13
NetR1_1: R1.1 R3.2 U1.2 | length 107.9
  Top Layer w12: U1.2 306.1,1434.84 R1.1 R3.2
NetR2_1: R2.1 U1.4 | length 75.6
  Top Layer w12: U1.4 254.92,1449.8 267.72,1462.6 R2.1
NetR4_2: R4.2 U1.3 | length 79.7
  Top Layer w12: U1.3 280.51,1441.93 303.15,1464.57 R4.2
NetR11_1: R11.1 U1.11 | length 78.3
  Top Layer w12: R11.1 101.38,1159.25 U1.11
NetT2_4: T2.4 U1.19 | length 335.7
  Top Layer w12: U1.19 306.1,1154.53 314.96,1145.67 314.96,1095.56 417.32,993.19 445.09,993.19 T2.4
NetT3_4: T3.4 U1.15 | length 1015.3
  Top Layer w12: U1.15 203.74,1146.65 208.66,1141.73 208.66,1035.43 338.58,905.51 669.29,905.51 681.1,893.7 681.1,783.46 696.85,767.72 850.39,767.72 862.2,755.91 862.2,737.8 T3.4
VPWT: C3.2 C13.2 C15.1 C16.2 P1.1 pad.3@535.43,669.29 R1.2 R2.2 T2.5 T2.6 T2.7 T2.8 U1.1 | length 1221
  Top Layer w12: R2.2 v2(267.72,1535.43) ; v2(376.77,1492.13) R1.2 376.77,1452.56 361.22,1437.01 342.52,1437.01 331.69,1426.18 U1.1 331.69,1384.84 340.18,1376.36 C15.1
  Bottom Layer w12: 28.18,854.33 28.18,1477 86.61,1535.43 v2(267.72,1535.43) 333.46,1535.43 v2(376.77,1492.13)
  other v1: 47.64,59.06 87.01,59.06 126.38,59.06 165.75,59.06 205.12,59.06 244.49,59.06 283.86,59.06 323.23,59.06 362.6,59.06 401.97,59.06 441.34,59.06 480.71,59.06 520.08,59.06 559.45,59.06 598.82,59.06 638.19,59.06 67.32,98.43 224.81,98.43 264.18,98.43 303.55,98.43 342.92,98.43 500.4,98.43 539.77,98.43 579.14,98.43 618.51,98.43 244.49,137.8 283.86,137.8 520.08,137.8 559.45,137.8 598.82,137.8 638.19,137.8 264.18,177.17 539.77,177.17 579.14,177.17 618.51,177.17 283.86,216.54 559.45,216.54 598.82,216.54 638.19,216.54 264.18,255.91 303.55,255.91 539.77,255.91 586.61,255.91 618.11,255.91 649.61,255.91 586.61,279.53 618.11,279.53 649.61,279.53 47.64,295.28 244.49,295.28 283.86,295.28 323.23,295.28 543.31,307.09 566.93,307.09 67.32,334.65 106.7,334.65 146.07,334.65 185.44,334.65 224.81,334.65 264.18,334.65 303.55,334.65 342.92,334.65 382.29,334.65 421.66,334.65 461.03,334.65 500.4,334.65 543.31,338.58 566.93,338.58 543.31,370.08 566.93,370.08 47.64,374.02 87.01,374.02 126.38,374.02 165.75,374.02 205.12,374.02 244.49,374.02 283.86,374.02 323.23,374.02 362.6,374.02 401.97,374.02 441.34,374.02 480.71,374.02 586.61,397.64 618.11,397.64 649.61,397.64 67.32,413.39 106.7,413.39 146.07,413.39 185.44,413.39 224.81,413.39 264.18,413.39 303.55,413.39 342.92,413.39 382.29,413.39 421.66,413.39 461.03,413.39 500.4,413.39 539.77,413.39 586.61,421.26 618.11,421.26 649.61,421.26 543.31,444.88 566.93,444.88 47.64,452.76 87.01,452.76 165.75,452.76 205.12,452.76 244.49,452.76 283.86,452.76 323.23,452.76 362.6,452.76 441.34,452.76 480.71,452.76 543.31,476.38 566.93,476.38 224.81,492.13 264.18,492.13 303.55,492.13 543.31,507.87 566.93,507.87 283.86,531.5 586.61,535.43 618.11,535.43 649.61,535.43 586.61,559.06 618.11,559.06 649.61,559.06 264.18,570.87 543.31,586.61 566.93,586.61 283.86,610.24 543.31,618.11 566.93,618.11 224.81,649.61 264.18,649.61 303.55,649.61 586.61,677.17 618.11,677.17 47.64,688.98 87.01,688.98 165.75,688.98 205.12,688.98 244.49,688.98 283.86,688.98 323.23,688.98 362.6,688.98 441.34,688.98 586.61,700.79 618.11,700.79 67.32,728.35 106.7,728.35 146.07,728.35 185.44,728.35 224.81,728.35 264.18,728.35 303.55,728.35 342.92,728.35 382.29,728.35 421.66,728.35 496.06,755.91 527.56,755.91 559.06,755.91 586.61,755.91 618.11,755.91 47.64,767.72 87.01,767.72 126.38,767.72 165.75,767.72 205.12,767.72 244.49,767.72 283.86,767.72 323.23,767.72 362.6,767.72 401.97,767.72 441.34,767.72 496.06,779.53 527.56,779.53 559.06,779.53 586.61,779.53 618.11,779.53 496.06,803.15 527.56,803.15 559.06,803.15 586.61,803.15 618.11,803.15 67.32,807.09 106.7,807.09 146.07,807.09 185.44,807.09 224.81,807.09 264.18,807.09 303.55,807.09 342.92,807.09 382.29,807.09 421.66,807.09 461.03,807.09 496.06,826.77 527.56,826.77 559.06,826.77 586.61,826.77 618.11,826.77 47.64,846.46 87.01,846.46 126.38,846.46 165.75,846.46 205.12,846.46 244.49,846.46 283.86,846.46 323.23,846.46 362.6,846.46 401.97,846.46 441.34,846.46 496.06,850.39 527.56,850.39 559.06,850.39 586.61,850.39 618.11,850.39 496.06,874.02 527.56,874.02 559.06,874.02 586.61,874.02 618.11,874.02
VSEN_N: C1.1 C3.1 C4.1 C5.1 C6.2 C7.2 C8.2 C9.2 C13.1 C15.2 C16.1 P3.1 P4.1 pad.3@476.38,1173.23 pad.4 R3.1 R4.1 R8.2 R9.2 R11.2 T3.1 T3.2 T3.3 U1.6 U1.14 U1.17 U1.21 | length 2595.2
  Top Layer w7: U1.21@203.74,1334.65 U1.6 ; U1.17 U1.21@254.92,1255.91
  Top Layer w12: R11.2 62.99,1010.58 82,991.57 113.42,991.57 v2(141.54,1019.69) R9.2 ; R8.2 176.54,1548.78 176.54,1512.78 195.89,1512.78 203.74,1504.92 ; U1.14 178.15,1111.22 C1.1 ; U1.6 203.74,1504.92 ; R4.1 303.15,1543.7 ; R3.1 308.66,1538.19 303.15,1543.7 ; 203.74,1504.92 212.38,1513.56 232.28,1513.56 232.28,1543.59 251.68,1562.99 283.86,1562.99 303.15,1543.7
  Top Layer w16: C1.1 179.13,1003.06 v2(192.91,989.28)
  Layer 2 w6: v2(141.54,1019.69) 129.92,1031.3 129.92,1051.18 137.8,1059.06 160.19,1059.06 242.87,976.38 645.67,976.38 704.72,917.32 704.72,787.4 720.47,771.65 v1(720.47,700.79)
  Layer 2 w16: v2(192.91,989.28) 225.5,956.69 634.25,956.69 682.97,907.97 682.97,657.48
  other v1: 685.43,59.06 732.68,59.06 779.92,59.06 1016.14,59.06 1063.39,59.06 1110.63,59.06 1157.87,59.06 1394.1,59.06 1441.34,59.06 1488.58,59.06 1535.83,59.06 1583.07,59.06 1630.32,59.06 1677.56,59.06 1724.8,59.06 1772.05,59.06 1819.29,59.06 1866.54,59.06 756.3,106.3 1039.76,106.3 1087.01,106.3 1134.25,106.3 1417.72,106.3 1464.96,106.3 1512.21,106.3 1559.45,106.3 1606.69,106.3 1653.94,106.3 1701.18,106.3 1748.43,106.3 1795.67,106.3 1842.91,106.3 685.43,153.54 732.68,153.54 779.92,153.54 1063.39,153.54 1110.63,153.54 1157.87,153.54 1441.34,153.54 1488.58,153.54 1535.83,153.54 1583.07,153.54 1630.32,153.54 1677.56,153.54 1724.8,153.54 1772.05,153.54 1819.29,153.54 1866.54,153.54 756.3,200.79 803.54,200.79 1039.76,200.79 1087.01,200.79 1134.25,200.79 1181.5,200.79 1606.69,200.79 1653.94,200.79 685.43,248.03 827.17,248.03 968.9,248.03 1016.14,248.03 1063.39,248.03 1110.63,248.03 1157.87,248.03 1205.12,248.03 1346.85,248.03 1630.32,248.03 720.47,255.91 751.97,255.91 783.46,255.91 720.47,279.53 751.97,279.53 783.46,279.53 850.79,295.28 898.03,295.28 945.28,295.28 992.52,295.28 1039.76,295.28 1087.01,295.28 1134.25,295.28 1181.5,295.28 1228.74,295.28 1275.98,295.28 1323.23,295.28 1370.47,295.28 1653.94,295.28 685.43,342.52 1016.14,342.52 1063.39,342.52 1110.63,342.52 1157.87,342.52 1394.1,342.52 1630.32,342.52 1677.56,342.52 1039.76,389.76 1087.01,389.76 1134.25,389.76 1417.72,389.76 1559.45,389.76 1606.69,389.76 1653.94,389.76 1701.18,389.76 1842.91,389.76 720.47,393.7 751.97,393.7 783.46,393.7 720.47,417.32 751.97,417.32 783.46,417.32 685.43,437.01 1063.39,437.01 1110.63,437.01 1157.87,437.01 1441.34,437.01 1488.58,437.01 1535.83,437.01 1583.07,437.01 1630.32,437.01 1677.56,437.01 1724.8,437.01 1772.05,437.01 1819.29,437.01 1866.54,437.01 1039.76,484.25 1087.01,484.25 1134.25,484.25 1181.5,484.25 1417.72,484.25 1464.96,484.25 1512.21,484.25 1559.45,484.25 1606.69,484.25 1653.94,484.25 1701.18,484.25 1748.43,484.25 1795.67,484.25 1842.91,484.25 685.43,531.5 827.17,531.5 968.9,531.5 1016.14,531.5 1063.39,531.5 1110.63,531.5 1157.87,531.5 1205.12,531.5 1346.85,531.5 1394.1,531.5 1441.34,531.5 1583.07,531.5 1630.32,531.5 1677.56,531.5 1724.8,531.5 1866.54,531.5 720.47,535.43 751.97,535.43 783.46,535.43 720.47,559.06 751.97,559.06 783.46,559.06 898.03,578.74 945.28,578.74 992.52,578.74 1039.76,578.74 1087.01,578.74 1134.25,578.74 1181.5,578.74 1228.74,578.74 1275.98,578.74 1323.23,578.74 1370.47,578.74 1606.69,578.74 1653.94,578.74 799.21,586.61 822.83,586.61 799.21,618.11 822.83,618.11 685.43,625.98 874.41,625.98 1252.36,625.98 1630.32,625.98 913.39,629.92 937.01,629.92 964.57,629.92 996.06,629.92 1027.56,629.92 1055.12,629.92 1078.74,629.92 1287.4,629.92 1318.9,629.92 1350.39,629.92 1129.92,633.86 1161.42,633.86 1192.91,633.86 964.57,653.54 996.06,653.54 1027.56,653.54 1287.4,653.54 1318.9,653.54 1350.39,653.54 1129.92,657.48 1161.42,657.48 1192.91,657.48 913.39,661.42 937.01,661.42 1055.12,661.42 1078.74,661.42 1228.35,669.29 1251.97,669.29 1653.94,673.23 720.47,677.17 751.97,677.17 783.46,677.17 913.39,692.91 937.01,692.91 1055.12,692.91 1078.74,692.91 751.97,700.79 783.46,700.79 1228.35,700.79 1251.97,700.79 1630.32,720.47 1677.56,720.47 1228.35,732.28 1251.97,732.28 71.26,909.45 118.5,909.45 165.75,909.45 212.99,909.45 260.24,909.45 142.13,956.69 425.59,1051.18 472.84,1051.18 71.26,1192.91 354.72,1192.91 401.97,1192.91 94.88,1240.16 378.35,1240.16 425.59,1240.16 472.84,1240.16 145.67,1248.03 169.29,1248.03 192.91,1248.03 216.54,1248.03 240.16,1248.03 263.78,1248.03 287.4,1248.03 145.67,1271.65 169.29,1271.65 192.91,1271.65 216.54,1271.65 240.16,1271.65 263.78,1271.65 287.4,1271.65 71.26,1287.4 449.21,1287.4 496.46,1287.4 145.67,1295.28 169.29,1295.28 192.91,1295.28 216.54,1295.28 240.16,1295.28 263.78,1295.28 287.4,1295.28 145.67,1318.9 169.29,1318.9 192.91,1318.9 216.54,1318.9 240.16,1318.9 263.78,1318.9 287.4,1318.9 94.88,1334.65 331.1,1334.65 425.59,1334.65 472.84,1334.65 145.67,1342.52 169.29,1342.52 192.91,1342.52 216.54,1342.52 240.16,1342.52 263.78,1342.52 287.4,1342.52 449.21,1381.89 496.46,1381.89 472.84,1429.13 449.21,1476.38 496.46,1476.38 472.84,1523.62 520.08,1523.62 567.32,1523.62 614.57,1523.62 661.81,1523.62 709.06,1523.62 756.3,1523.62 803.54,1523.62 945.28,1523.62 992.52,1523.62 1039.76,1523.62 1087.01,1523.62 1134.25,1523.62 1181.5,1523.62 1228.74,1523.62 1275.98,1523.62 1323.23,1523.62 1370.47,1523.62 1417.72,1523.62 1464.96,1523.62 1512.21,1523.62 1559.45,1523.62 1606.69,1523.62 1653.94,1523.62 1701.18,1523.62 1748.43,1523.62 1795.67,1523.62 1842.91,1523.62
VSEN_P: L2.1 pad.3@559.06,1122.05 R10.2 R12.2 T2.1 T2.2 T2.3 T3.5 T3.6 T3.7 T3.8 U1.20 | length 1123.8
  Top Layer w12: v2(106.08,1019.69) R10.2 ; U1.20 331.69,1164.37 342.52,1153.54 380.7,1153.54 R12.2 400.39,1133.86 413.39,1133.86 437.01,1110.24 pad.3@555.12,1110.24
  Layer 2 w6: v2(106.08,1019.69) 117.92,1031.52 117.92,1056.15 132.82,1071.06 165.17,1071.06 247.84,988.38 650.64,988.38 716.72,922.29 716.72,806.9 v1(724.41,799.21)
  other v1: 751.97,799.21 783.46,799.21 811.02,799.21 842.52,799.21 874.02,799.21 751.97,822.83 783.46,822.83 811.02,822.83 842.52,822.83 874.02,822.83 751.97,846.46 783.46,846.46 811.02,846.46 842.52,846.46 874.02,846.46 751.97,870.08 783.46,870.08 811.02,870.08 842.52,870.08 874.02,870.08 751.97,893.7 783.46,893.7 811.02,893.7 842.52,893.7 874.02,893.7 751.97,917.32 783.46,917.32 811.02,917.32 842.52,917.32 874.02,917.32 736.62,1003.94 775.99,1003.94 815.36,1003.94 854.73,1003.94 559.45,1043.31 598.82,1043.31 638.19,1043.31 677.56,1043.31 835.04,1043.31 579.14,1082.68 618.51,1082.68 657.88,1082.68 854.73,1082.68 835.04,1122.05 854.73,1161.42 559.45,1200.79 835.04,1200.79 854.73,1240.16 559.45,1279.53 835.04,1279.53 854.73,1318.9 559.45,1358.27 835.04,1358.27 579.14,1397.64 618.51,1397.64 657.88,1397.64 854.73,1397.64 559.45,1437.01 598.82,1437.01 638.19,1437.01 677.56,1437.01 716.93,1437.01 756.3,1437.01 795.67,1437.01 835.04,1437.01

## Polygon pours and split planes (outlines as drawn)
VSEN_N on Top Layer "VSEN_N_L01_P227" (solid, remove dead copper, pour order 227): 515.75,1137.8 515.75,1496.06 1909.45,1496.06 1909.45,1606.3 417.32,1606.3 417.32,1346.46 319.88,1346.46 308.07,1358.27 98.43,1358.27 78.74,1377.95 78.74,1403.34 60.82,1421.26 0,1421.26 0,1148.07 63.63,1148.07 84.46,1168.9 84.46,1215.36 101.38,1232.28 342.52,1232.28 437.01,1137.8
VSEN_N on Top Layer "VSEN_N_L01_P228" (solid, remove dead copper, pour order 228): 704.72,0 1909.45,0 1909.45,748.03 704.72,748.03
+3V3 on Top Layer "+3V3_L01_P226" (solid, remove dead copper, pour order 226): 1909.45,780.42 917.32,780.42 917.32,1488.19 1909.45,1488.19
VPWT on Top Layer "VPWT_L01_P225" (solid, remove dead copper, pour order 225): 0,885.83 661.42,885.83 661.42,0 0,0 0,578.74
VSEN_P on Top Layer "VSEN_P_L01_P224" (solid, remove dead copper, pour order 224): 704.72,923.61 704.72,783.46 893.7,783.46 893.7,1488.19 527.54,1488.19 527.54,923.61
no net on Top Layer "Top Layer-No Net 1" (solid, pour order 222): 897.64,1081.49
VSEN_N on Top Layer "VSEN_N_L01_P223" (solid, remove dead copper, pour order 223): 165.35,1578.74 165.35,1501.19 241.69,1501.19 241.69,1540.91 251.97,1551.18 279.72,1551.18 291.54,1539.37 291.54,1507.87 310.43,1507.87 330.12,1527.56 359.45,1527.56 370.08,1538.19 370.08,1572.42 358.27,1584.23 170.85,1584.23
no net on Top Layer "Top Layer-No Net" (solid, pour order 221): 161.42,1574.8
VSEN_N on Bottom Layer "VSEN_N_L04_P234" (solid, remove dead copper, pour order 234): 0,0 1909.45,0 1909.45,1606.3 0,1606.3
VPWT on Bottom Layer "VPWT_L04_P232" (solid, remove dead copper, pour order 232): 0,885.83 661.42,885.83 661.42,0 0,0 0,578.74
VSEN_P on Bottom Layer "VSEN_P_L04_P231" (solid, remove dead copper, pour order 231): 704.72,923.61 704.72,783.46 909.45,783.46 909.45,1488.19 527.54,1488.19 527.54,923.61
+3V3 on Bottom Layer "+3V3_L04_P233" (solid, remove dead copper, pour order 233): 1909.45,780.42 917.32,780.42 917.32,1488.19 1909.45,1488.19
VSEN_N on Layer 2 "VSEN_N_L03_P229" (solid, remove dead copper, pour order 229): 0,1606.3 1909.45,1606.3 1909.45,2.03 0,2.03
VSEN_N on Layer 1 "VSEN_N_L02_P230" (solid, remove dead copper, pour order 230): 3.94,1606.3 1915.35,1606.3 1915.35,-5.27 3.94,-5.27

## Keep-outs
Keep-Out Layer:
  the board outline again, w20

## Other copper
Top Layer:
  pour cut-out: 838.58,748.03 838.58,700.79 846.46,692.91 893.7,692.91 901.57,700.79 901.57,748.03
Layer 2:
  pour cut-out: 735.44,692.91 665.35,692.91 665.35,898.59 625.98,937.96 112.12,937.96 69.77,980.32 69.77,1054.26 110,1094.49 164.79,1094.49 257.78,1001.5 675.67,1001.5 735.44,941.73
Layer 1:
  pour cut-out: 600.17,905.79
  pour cut-out: 600.17,905.79
Multi-Layer:
  pour cut-out: 173.23,989.28 ccw(c192.91,989.28) 212.6,989.28
  pour cut-out: 212.6,989.28 ccw(c192.91,989.28) 173.23,989.28
  pour cut-out: 125.77,1019.69 ccw(c106.08,1019.69) 86.4,1019.69
  pour cut-out: 86.4,1019.69 ccw(c106.08,1019.68) 125.77,1019.69
  pour cut-out: 161.22,1019.69 ccw(c141.54,1019.69) 121.85,1019.69
  pour cut-out: 121.85,1019.69 ccw(c141.54,1019.68) 161.22,1019.69

## Silkscreen, mask and mechanical layers (free items; w line width, h text height)
Top Overlay:
  text "REV 1.5.0" at 1287.4,1492.13 h64
  text "OUT" at 1267.72,1173.23 h48 r90
  text "IN" at 535.43,35.43 h48